# Altium PCB PCB1.PcbDoc (part 2 of 2)
Units mil, origin at the board's own origin, x right, y up, seen from the top; angles counter-clockwise.
Board outline 3937.01 x 3937.01 mil, 4 copper layers (L1, L2, L3, L4), stack 61.811 mil thick; 168 components, 216 nets, 917 pads, 302 vias.
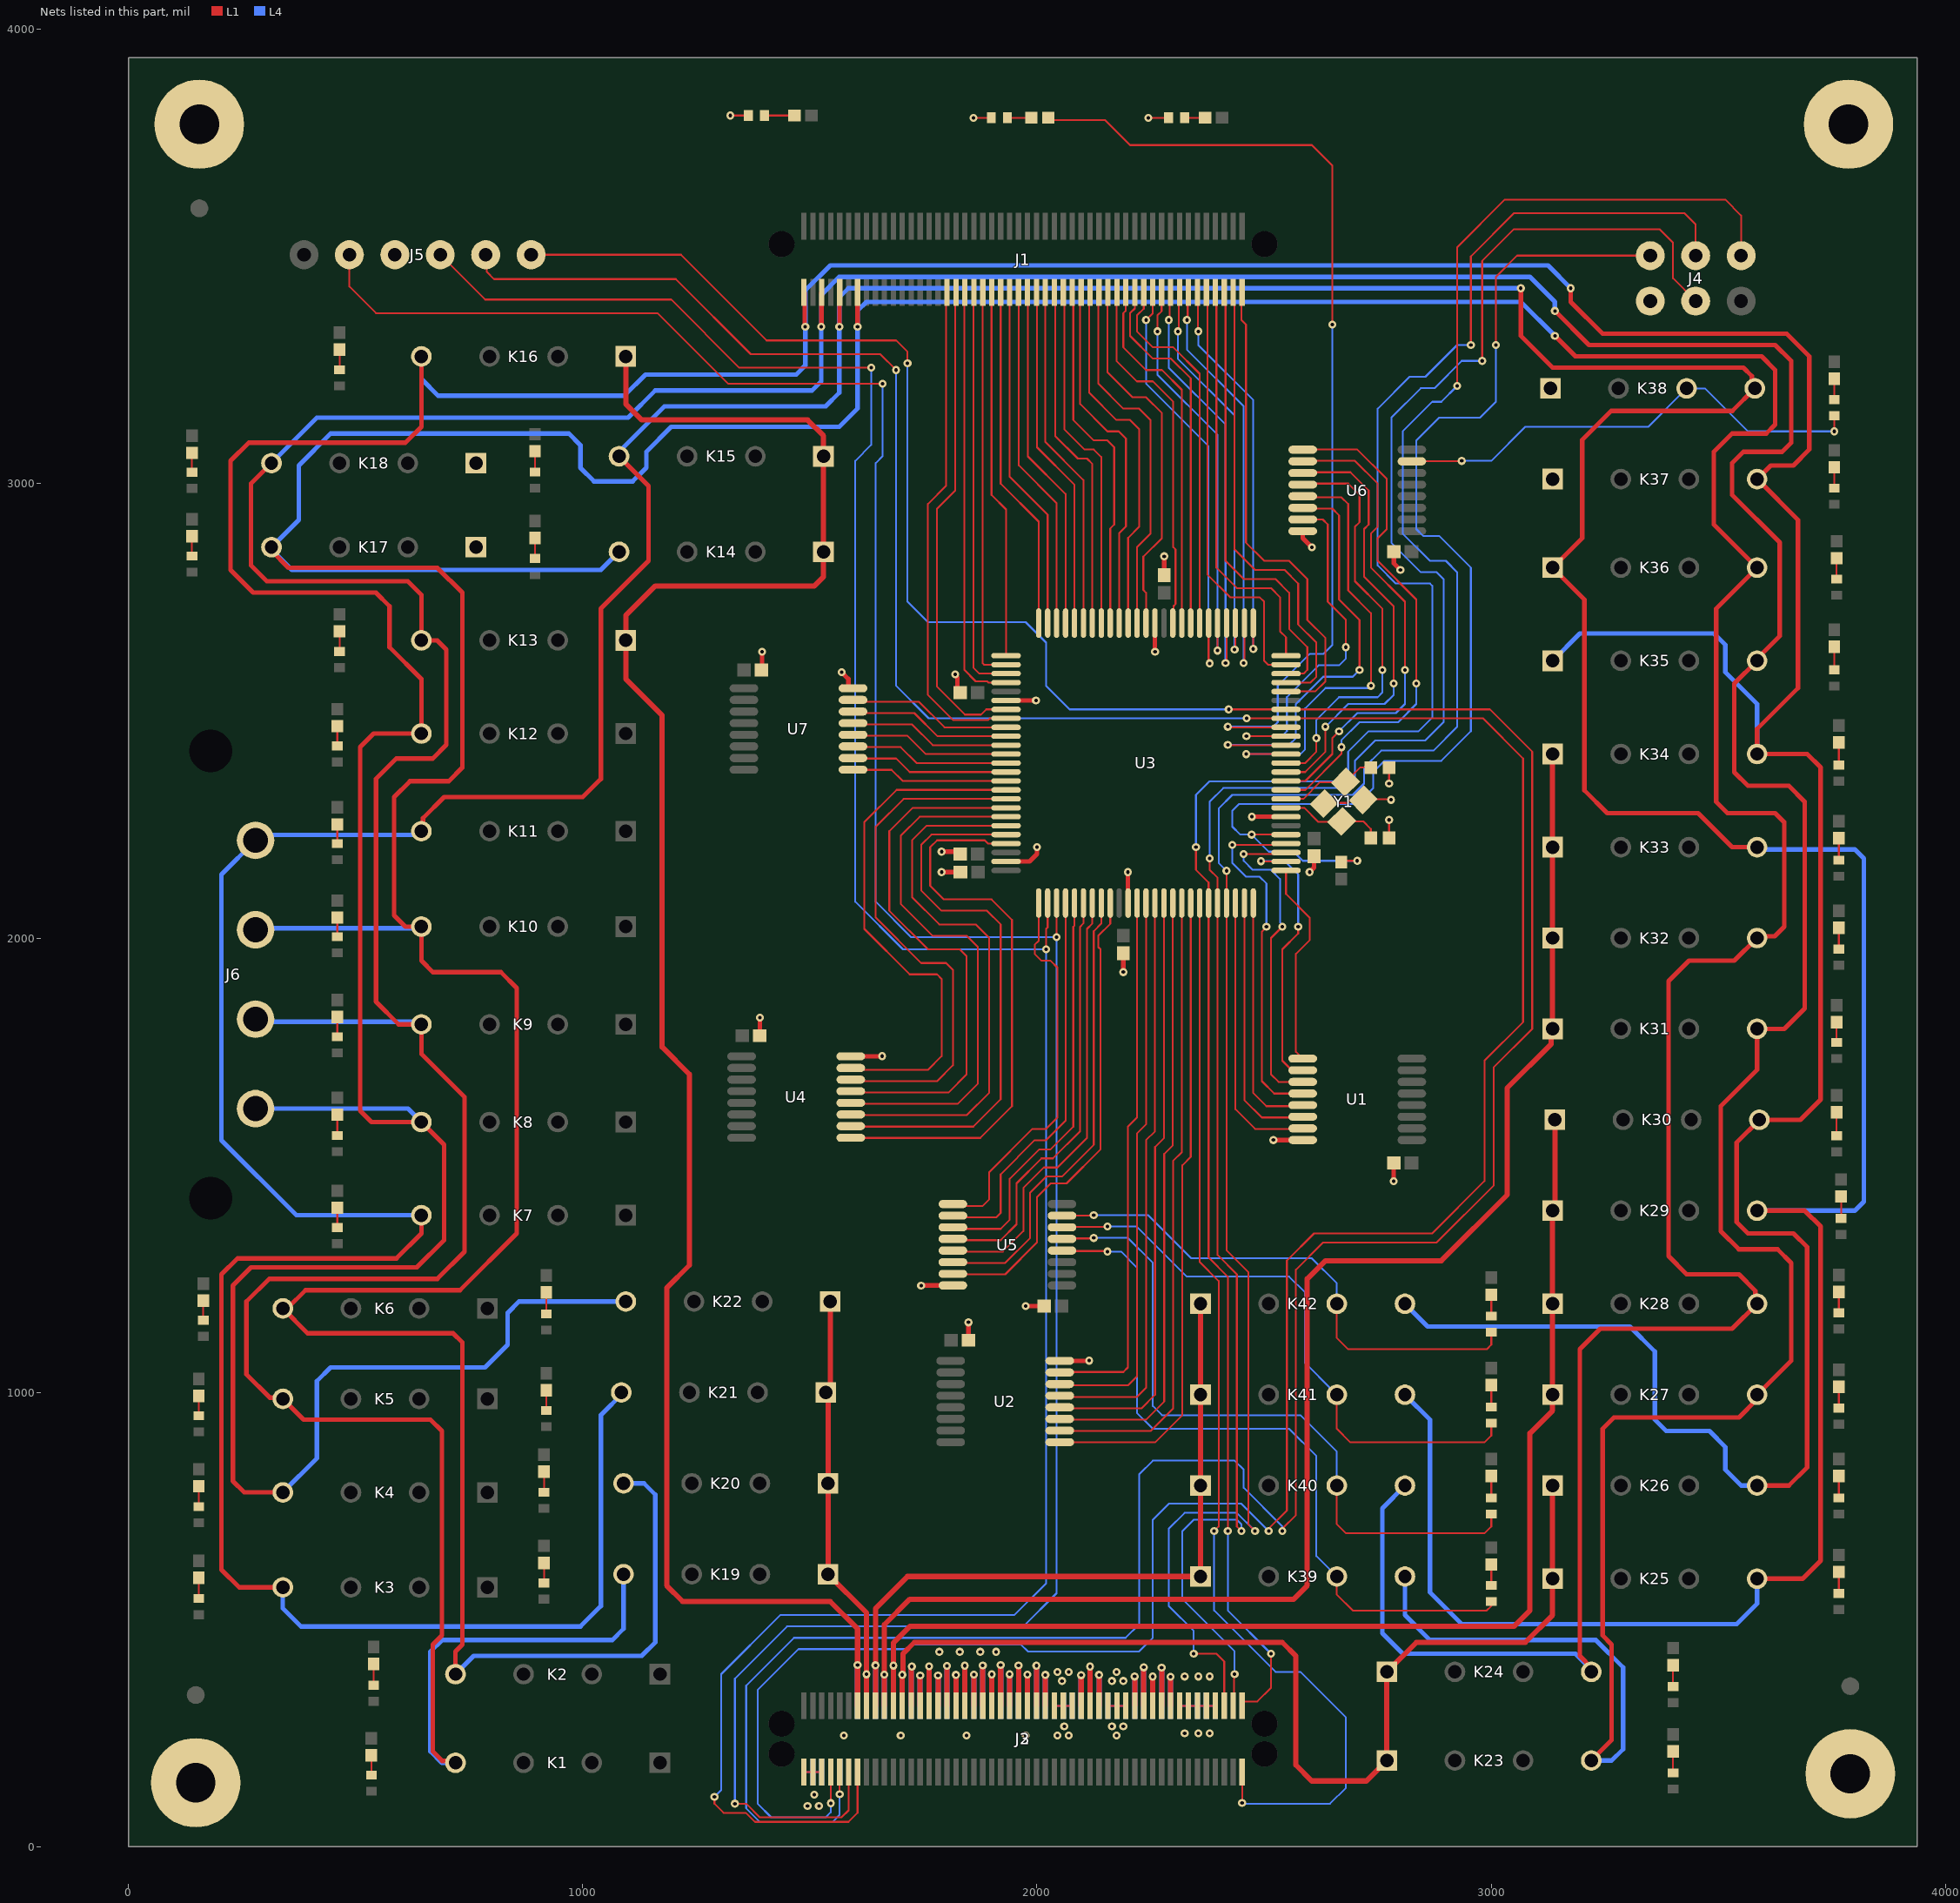
[diagram p4: the nets of this part, all layers, seen from the top]

## Via types
v1: diameter 17.72, hole 7.87, L1 to L4, 302 vias

## Nets (pads, with @x,y where several pads share a name; then routed paths per layer and width w, separated by ;. In a path a pad name is that pad's centre, name@x,y a point inside that pad or via, vN(x,y) a via of type N, cw(c..) or ccw(c..) an arc to the next point about the centre after c; other vN are vias at no path point) (continued)
COIL37: D40.1 K38.3 U6.15 | length 1070.2
  L1 w4: U6.15@2825.08,3048.98 2825.59,3049.49 2934.49,3049.49 v1(2935,3050) ; v1(3755,3115) D40.1@3755,3149.57
  L4 w4: v1(2935,3050) 3000,3050 3075,3125 3345.43,3125 K38.3@3430,3209.57 3470.43,3209.57 3565,3115 v1(3755,3115)
COIL38: D43.1 K39.3 U5.12 | length 1627
  L1 w4: U5.12@2055.08,1312.2 2056.18,1311.1 2153.9,1311.1 v1(2155,1310) ; K39.3@2660,595 2660,555 2695,520 2990,520 3000,530 D43.1@3000,540
  L4 w4: v1(2155,1310) 2185,1310 2220,1275 2220,955 2255,920 2555,920 2615,860 2615,640 K39.3@2660,595
COIL39: D26.1 K40.3 U5.13 | length 1546.9
  L1 w4: U5.13@2055.08,1337.8 2056.18,1338.9 2123.9,1338.9 v1(2125,1340) ; K40.3@2660,795 2660,710 2680,690 2985,690 3000,705 D26.1@3000,732.38
  L4 w4: v1(2125,1340) 2200,1340 2255,1285 2255,970 2275,950 2580,950 2660,870 K40.3@2660,795 2670,795 K40.3@2670,805
COIL40: D32.1 K41.3 U5.14 | length 1323.3
  L1 w4: U5.14@2055.08,1363.39 2055.89,1364.19 2154.19,1364.19 v1(2155,1365) ; K41.3@2660,995 2665,990 2660,985 2660,920 2690,890 2985,890 3000,905 D32.1@3000,932.38 D32.1@3000,935
  L4 w4: v1(2155,1365) 2220,1365 2330,1255 2555,1255 2590,1220 2590,1065 2650,1005 2650,995 K41.3@2660,995
COIL41: D38.1 K42.3 U5.15 | length 1172
  L1 w4: U5.15@2055.08,1388.98 2055.59,1389.49 2124.49,1389.49 v1(2125,1390) ; K42.3@2660,1195 2660,1120 2685,1095 2990,1095 3000,1105 D38.1@3000,1132.38 D38.1@3000,1135
  L4 w4: v1(2125,1390) 2245,1390 2340,1295 2605,1295 2660,1240 K42.3@2660,1195
COM: J2.67 J3.68 | length 135.8
  L1 w11.55: J2.67@2136.57,310.51 v1(2136.57,378.43)
  L4 w11.55: J3.68@2136.57,310.51 v1(2136.57,378.43)
D: J2.13 J3.14 K13.1 K14.1 K15.1 K16.1 | length 4281.2
  L1 w11.55: K16.1@1095,3280 1095,3175 1130,3140 1495,3140 1530,3105 K15.1@1530,3060 K14.1@1530,2850 1530,2795 1510,2775 1160,2775 1095,2710 K13.1@1095,2655 1095,2570 1175,2490 1175,1760 1235,1700 1235,1280 1185,1230 1185,575 1220,540 1545,540 1605.08,479.92 v1(1605.08,399.92) J2.13@1605.08,310.51
  L4 w11.55: J3.14@1605.08,310.51 v1(1605.08,399.92)
DATA: R3.1 U3.42 | length 2206.4
  L1 w4: R3.1@2025,3800 2150,3800 2205,3745 2605,3745 2650,3700 v1(2650,3350) ; v1(2420,2465) 2421.26,2463.74 U3.42@2548.07,2463.74
  L4 w4: v1(2420,2465) 2520,2465 2530,2475 2530,2555 2600,2625 2630,2625 2650,2645 v1(2650,3350) v1@2650,3355
E: J2.15 J3.16 K19.1 K20.1 K21.1 K22.1 | length 995.9
  L1 w11.55: K22.1@1545,1200 1545,1005 1540,1000 K20.1@1540,800 K19.1@1540,600 1624.76,515.24 v1(1624.76,379.76) J2.15@1624.76,310.51
  L4 w11.55: J3.16@1624.76,310.51 v1(1624.76,379.76)
F: J2.17 J3.18 K39.1 K40.1 K41.1 K42.1 | length 1647.6
  L1 w11.55: J2.17@1644.45,310.51 v1(1644.45,399.45) 1644.45,524.45 1715,595 K39.1@2360,595 K40.1@2360,795 K41.1@2360,995 K42.1@2360,1195
  L4 w11.55: J3.18@1644.45,310.51 v1(1644.45,399.45)
G: J2.19 J3.20 K31.1 K32.1 K33.1 K34.1 | length 3425.9
  L1 w11.55: J2.19@1664.13,310.51 v1(1664.13,379.13) 1664.13,489.13 1720,545 2565,545 2595,575 2595,1250 2635,1290 2890,1290 3035,1435 3035,1670 3131.8,1766.8 3131.8,1796.8 K31.1@3135,1800 3135,1990 K33.1@3135,2200 K34.1@3135,2400 ; K34.1@3130,2420 K34.1@3140,2410
  L4 w11.55: J3.20@1664.13,310.51 v1(1664.13,379.13)
GND: C1.1 C2.1 C3.1 C4.1 C5.1 C6.1 C7.1 C8.1 C9.1 C10.1 C11.1 C12.1 C13.1 C14.1 D1.1 D2.1 D3.1 J2.2 J2.4 J2.6 J2.69 J2.71 J2.73 J2.85 J2.87 J2.89 J2.91 J2.93 J3.1 J3.3 J3.5 J3.70 J3.72 J3.74 J3.86 J3.88 J3.90 J3.92 J3.94 J4.6 J5.3 K17.1 K18.1 K37.1 K38.1 MH1.1 MH2.1 MH3.1 MH4.1 U1.8 U2.8 U3.11 U3.32 U3.62 U3.81 U3.99 U4.8 U5.8 U6.8 U7.8 Y1.2 Y1.4 | length 1933.9
  L1 w4: v1(1325,3810) D1.1@1365,3810 ; C11.1@1393.58,2590 C11.1@1395,2591.42 ; J2.2@1486.97,164.84 J2.4@1506.65,164.84 J2.6@1526.34,164.84 ; U7.8@1572.22,2555.9 1570,2555.9 1576.34,2549.57 U7.8@1595.08,2549.57 ; v1@1658.7,1739.57 v1(1659.13,1740) ; v1(1745,1235) v1@1745.43,1235.43 ; C2.1@1817.75,2552.17 C2.1@1825,2544.92 ; v1(1860,3805) D2.1@1899.57,3805 ; v1@2114.57,1069.57 v1(2115,1070) ; J2.69@2156.26,310.51 J2.71@2175.94,310.51 J2.73@2195.63,310.51 ; v1(2200,2145) v1@2200.31,2144.69 ; U3.11@2200.31,2077.87 2200,2077.56 U3.11@2200.63,2076.93 ; v1(2245,3805) D3.1@2289.57,3805 ; v1@2259.68,2630.32 v1(2260,2630) ; J2.85@2313.74,310.51 J2.87@2333.43,310.51 J2.89@2353.11,310.51 J2.91@2372.8,310.51 J2.93@2392.48,310.51 ; U6.8@2584.92,2895.43 2590,2890.35 2586.26,2890.35 U6.8@2585,2889.1 ; Y1.4@2631.85,2295.82 2633.24,2297.22 2683.4,2297.22 2690.36,2304.18 Y1.2@2718.15,2304.18 2719.54,2305.57 2777.78,2305.57 v1(2779.18,2304.18) ; v1(2775,2260) 2775.08,2259.92 C13.1@2775.08,2220 ; v1(2775.08,2340.08) C14.1@2775.08,2375 ; C9.1@2785,1504.29 C9.1@2785.71,1505
  L1 w10: C8.1@1390,1785 v1(1390,1825) ; C11.1@1395,2591.42 v1(1395,2630) ; v1(1570,2585) 1585,2570 1585,2553.13 1588.56,2549.57 U7.8@1595.08,2549.57 ; U4.8@1590.08,1739.57 v1@1658.7,1739.57 ; v1@1745.43,1235.43 U5.8@1814.92,1235.43 ; v1(1790,2145) C1.1@1831.42,2145 ; v1(1790,2190) C5.1@1831.42,2190 ; v1(1820,2580) 1820,2577.91 1825,2572.91 1825,2544.92 1829.92,2540 C2.1@1830.71,2540 ; C10.1@1849.29,1115 v1(1849.29,1154.29) ; U3.99@1931.93,2168.46 1983.46,2168.46 2000,2185 v1(2000,2200) ; U3.81@1931.93,2522.8 v1(1997.8,2522.8) ; v1(1975,1190) C12.1@2015.71,1190 ; U2.8@2050.08,1069.57 v1@2114.57,1069.57 ; v1(2190,1925) C6.1@2190,1966.42 ; U3.11@2200.31,2077.87 v1@2200.31,2144.69 ; v1@2259.68,2630.32 U3.62@2259.68,2693.07 ; C3.1@2280,2798.58 v1(2280,2840) ; v1(2473.11,2266.89) U3.32@2548.07,2266.89 ; v1(2520.43,1555.43) U1.8@2584.92,1555.43 ; U6.8@2585,2889.1 2585,2880 v1(2605,2860) ; v1(2600,2145) 2610,2155 C4.1@2610,2180 ; v1(2785,1465) C9.1@2785,1504.29 ; C7.1@2785.71,2850 2785.71,2824.29 v1(2800,2810)
  L4 w4: J3.1@1486.97,164.84 J3.3@1506.65,164.84 J3.5@1526.34,164.84 ; J3.70@2156.26,310.51 J3.72@2175.94,310.51 J3.74@2195.63,310.51 ; J3.86@2313.74,310.51 J3.88@2333.43,310.51 J3.90@2353.11,310.51 J3.92@2372.8,310.51 J3.94@2392.48,310.51
  other v1: 1495,90 1520,90 1510,115 1575,245 1700,245 1845,245 1975,245 2175,245 2325,250 2355,250 2380,250 2165,265 2190,265 2165,365 2190,365 2325,375 2355,375 2380,375 2175,385 1785,429.14 1830,429.14 1875,429.14 1910,429.14
GPIO1: J1.100 U3.46 | length 1060.1
  L1 w4: J1.100@2450,3420 2450,3360 2460,3350 2460,2870 2500,2830 2555,2830 2595,2790 2595,2700 2635,2660 2635,2565 2612.48,2542.48 U3.46@2548.07,2542.48
GPIO2: J1.98 U3.47 | length 1032
  L1 w4: J1.98@2430,3420 2435,3415 2435,2855 2480,2810 2545,2810 2575,2780 2575,2690 2615,2650 2615,2575 2602.17,2562.17 U3.47@2548.07,2562.17
GPIO3: J1.96 U3.48 | length 995.9
  L1 w4: J1.96@2415,3420 2415,2830 2455,2790 2525,2790 2555,2760 2555,2680 2595,2640 2595,2590 2586.85,2581.85 U3.48@2548.07,2581.85
GPIO4: J1.94 U3.50 | length 906.1
  L1 w4: J1.94@2395,3420 2395,2815 2440,2770 2515,2770 2535,2750 2535,2675 2548.07,2661.93 U3.50@2548.07,2621.22
GPIO5: J1.92 U3.49 | length 946.4
  L1 w4: J1.92@2375,3415 2375,2800 2425,2750 2490,2750 2500,2740 2500,2610 2508.46,2601.54 U3.49@2548.07,2601.54
GPIO6: J1.90 U3.51 | length 892.4
  L1 w4: J1.90@2353.11,3420.75 2354.06,3419.8 2354.06,3335.94 v1(2355,3335) ; v1(2476.22,2636.22) U3.51@2476.22,2693.07
  L4 w4: v1(2355,3335) 2355,3305 2476.22,3183.78 v1(2476.22,2636.22)
GPIO7: J1.88 U3.52 | length 957.7
  L1 w4: v1(2330,3360) 2331.71,3361.71 2331.71,3419.04 J1.88@2333.43,3420.75 ; v1(2455,2605) 2456.54,2606.54 U3.52@2456.54,2693.07
  L4 w4: v1(2330,3360) 2330,3295 2455,3170 v1(2455,2605)
GPIO8: J1.86 U3.53 | length 897.9
  L1 w4: v1(2310,3335) 2311.87,3336.87 2311.87,3418.88 J1.86@2313.74,3420.75 ; v1(2435,2635) 2436.85,2636.85 U3.53@2436.85,2693.07
  L4 w4: v1(2310,3335) 2310,3275 2435,3150 v1(2435,2635)
GPIO9: J1.84 U3.54 | length 958.2
  L1 w4: v1(2290,3360) 2292.03,3362.03 2292.03,3418.72 J1.84@2294.06,3420.75 ; v1(2415,2605) 2417.17,2607.17 U3.54@2417.17,2693.07
  L4 w4: v1(2290,3360) 2290,3255 2415,3130 v1(2415,2605)
GPIO10: J1.82 U3.55 | length 909.6
  L1 w4: v1(2265,3335) 2265,3370 2274.37,3379.37 J1.82@2274.37,3420.75 ; v1(2397.48,2632.52) U3.55@2397.48,2693.07
  L4 w4: v1(2265,3335) 2265,3240 2397.48,3107.52 2397.48,2637.48 2395,2635 v1(2397.48,2632.52)
GPIO11: J1.80 U3.56 | length 970
  L1 w4: v1(2240,3360) 2254.69,3374.69 J1.80@2254.69,3420.75 ; U3.56@2377.8,2693.07 2377.8,2606.61 v1(2380,2604.41)
  L4 w4: v1(2240,3360) 2240,3220 2377.38,3082.62 2377.38,2607.03 v1(2380,2604.41)
GPIO12: J1.78 U3.57 | length 817.5
  L1 w4: J1.78@2235,3420.75 2235,3385 2220,3370 2220,3335 2255,3300 2300,3300 2358.11,3241.89 U3.57@2358.11,2693.07
GPIO13: J1.76 U3.58 | length 810.6
  L1 w4: J1.76@2215.32,3420.75 2215.32,3385.32 2205,3375 2205,3325 2255,3275 2295,3275 2338.43,3231.57 U3.58@2338.43,2693.07
GPIO14: J1.74 U3.59 | length 803.8
  L1 w4: J1.74@2195.63,3420.75 2195.63,3380.63 2190,3375 2190,3300 2240,3250 2275,3250 2318.74,3206.26 U3.59@2318.74,2693.07
GPIO15: J1.72 U3.60 | length 804.5
  L1 w4: J1.72@2175,3420.75 2175,3270 2220,3225 2255,3225 2300,3180 2300,2860 2305,2855 2305,2735 2300.55,2730.55 2300.55,2694.57 U3.60@2299.06,2693.07
GPIO16: J1.70 U3.63 | length 814.3
  L1 w4: J1.70@2155,3420.75 2155,3245 2210,3190 2240,3190 2275,3155 2275,2880 2234.14,2839.14 2234.14,2765.86 2240,2760 U3.63@2240,2693.07
GPIO17: J1.68 U3.64 | length 808.1
  L1 w4: J1.68@2135,3420.75 2135,3220 2190,3165 2225,3165 2250,3140 2250,2890 2220.31,2860.31 U3.64@2220.31,2693.07
GPIO18: J1.66 U3.65 | length 800.9
  L1 w4: J1.66@2115,3420.75 2115,3200 2175,3140 2205,3140 2225,3120 2225,2905 2200.63,2880.63 U3.65@2200.63,2693.07
GPIO19: J1.64 U3.66 | length 790.3
  L1 w4: J1.64@2095,3420.75 2095,3175 2155,3115 2180,3115 2195.84,3099.16 2195.84,2905.84 2180.94,2890.94 U3.66@2180.94,2693.07
GPIO20: J1.62 U3.67 | length 787.2
  L1 w4: J1.62@2077.52,3420.75 2080,3418.27 2080,3140 2125,3095 2155,3095 2170,3080 2170,2910 2161.26,2901.26 U3.67@2161.26,2693.07
GPIO21: J1.60 U3.68 | length 774.1
  L1 w4: J1.60@2057.83,3420.75 2060,3418.58 2060,3120 2105,3075 2125,3075 2141.57,3058.43 U3.68@2141.57,2693.07
GPIO22: J1.58 U3.69 | length 774.1
  L1 w4: J1.58@2038.15,3420.75 2040,3418.9 2040,3105 2090,3055 2110,3055 2121.89,3043.11 U3.69@2121.89,2693.07
GPIO23: J1.56 U3.70 | length 762.4
  L1 w4: J1.56@2018.46,3420.75 2018.46,3091.54 2102.2,3007.8 U3.70@2102.2,2693.07
GPIO24: J1.54 U3.71 | length 761.9
  L1 w4: J1.54@2000,3420.75 2000,3080 2082.52,2997.48 U3.71@2082.52,2693.07
GPIO25: J1.52 U3.72 | length 762
  L1 w4: J1.52@1980,3420.75 1980,3060 2062.83,2977.17 U3.72@2062.83,2693.07
GPIO26: J1.50 U3.73 | length 762.1
  L1 w4: J1.50@1960,3420.75 1960,3040 2043.15,2956.85 U3.73@2043.15,2693.07
GPIO27: J1.48 U3.74 | length 762.2
  L1 w4: J1.48@1940,3420.75 1940,3015 2023.46,2931.54 U3.74@2023.46,2693.07
GPIO28: J1.46 U3.75 | length 762.4
  L1 w4: J1.46@1920.04,3420.75 1920,3000 2003.78,2916.22 U3.75@2003.78,2693.07
GPIO29: J1.44 U3.76 | length 812.8
  L1 w4: J1.44@1900,3420.75 1900,2975 1931.93,2943.07 U3.76@1931.93,2621.22
GPIO30: J1.42 U3.77 | length 869.1
  L1 w4: J1.42@1880,3420.75 1880,2605 1883.46,2601.54 U3.77@1931.93,2601.54
GPIO31: J1.40 U3.78 | length 903.1
  L1 w4: J1.40@1860,3420.75 1860,2595 1873.15,2581.85 U3.78@1931.93,2581.85
GPIO32: J1.38 U3.79 | length 934.2
  L1 w4: J1.38@1840,3420.75 1840,2590 1865,2565 1890,2565 1892.83,2562.17 U3.79@1931.93,2562.17
GPIO33: J1.36 U3.82 | length 1066.3
  L1 w4: J1.36@1820,3420.75 1820,2985 1780,2945 1780,2553.09 1841.38,2491.71 1876.71,2491.71 1888.11,2503.11 U3.82@1931.93,2503.11
GPIO34: J1.34 U3.83 | length 1099.2
  L1 w4: J1.34@1801.93,3420.75 1800,3418.82 1800,2995 1760,2955 1760,2535 1815,2480 1893.03,2480 1896.45,2483.43 U3.83@1931.93,2483.43
H: J2.21 J3.22 K27.1 K28.1 K29.1 K30.1 | length 2760.1
  L1 w11.55: J2.21@1683.82,310.51 v1(1683.82,398.82) 1683.82,448.82 1720,485 3050,485 3085,520 3085,910 3135,960 K27.1@3135,995 K28.1@3135,1195 K29.1@3135,1400 3140,1405 K30.1@3140,1600
  L4 w11.55: J3.22@1683.82,310.51 v1(1683.82,398.82)
I: J2.23 J3.24 K23.1 K24.1 K25.1 K26.1 | length 2440.2
  L1 w11.55: J2.23@1703.5,310.51 v1(1703.5,378.5) ; v1@1704.94,378.5 1704.94,424.94 1730,450 2540,450 2570,420 2570,180 2605,145 2725,145 K23.1@2770,190 K24.1@2770,385 2835,450 3075,450 3135,510 K25.1@3135,590 K26.1@3135,795
  L4 w11.55: J3.24@1703.5,310.51 v1(1703.5,378.5)
I-S_HIGH: J1.10 J6.1 K3.4 K7.4 K11.4 K15.4 K21.4 K25.4 K29.4 K33.4 K36.1 K38.4 K41.4 | length 13679.6
  L1 w4: K11.4@645,2235 K11.4@648.64,2238.64 ; v1(1565,3345) v1@1565.35,3345.35 ; J1.10@1565.35,3420.39 J1.10@1565.71,3420.75
  L1 w10: K3.4@340,570.99 244.01,570.99 205,610 205,1260 240,1295 590,1295 645,1350 K7.4@645,1390 ; K11.4@648.64,2238.64 648.64,2263.64 695,2310 1000,2310 1040,2350 1040,2725 1145,2830 1145,2995 K15.4@1080,3060 ; v1@1565.35,3345.35 J1.10@1565.35,3420.39 ; v1(3065,3430) 3065,3325 3135,3255 3555,3255 3573.6,3236.4 3573.6,3215.97 K38.4@3580,3209.57 3530.43,3160 3263.91,3160 3200,3096.09 3200,2880 K36.1@3135,2815 3205,2745 3205,2325 3255,2275 3455,2275 3530,2200 K33.4@3585,2200 ; K25.4@3585,590 3685,590 3725,630 3725,1365 3690,1400 K29.4@3585,1400
  L4 w4: J6.1@280.04,2215 J6.1@292.14,2227.1 ; K11.4@637.1,2227.1 K11.4@645,2235 ; K15.4@1080,3060 K15.4@1080,3070 ; v1@3056.29,3430 v1(3065,3430) ; K33.4@3585,2200 K33.4@3590,2195
  L4 w10: J6.1@280.04,2215 205,2139.96 205,1555 370,1390 K7.4@645,1390 ; J6.1@292.14,2227.1 K11.4@637.1,2227.1 ; K3.4@340,570.99 340,525 380,485 995,485 1040,530 1040,950 K21.4@1090,1000 ; K15.4@1080,3070 1180,3170 1535,3170 1565,3200 v1(1565,3345) 1565,3410 1585,3430 v1@3056.29,3430 ; K41.4@2810,995 2865,940 2865,560 2935,490 3540,490 3585,535 K25.4@3585,590 ; K29.4@3585,1400 3800,1400 3820,1420 3820,2175 3800,2195 K33.4@3590,2195
J: J2.25 J3.26 | length 173.7
  L1 w11.55: J2.25@1723.19,310.51 1723.19,393.75 1724.57,395.14 v1(1724.57,396.81)
  L4 w11.55: J3.26@1723.19,310.51 1723.19,393.75 1724.57,395.14 v1(1724.57,396.81)
K: J2.27 J3.28 | length 133.2
  L1 w11.55: J2.27@1742.87,310.51 v1(1742.87,377.13)
  L4 w11.55: J3.28@1742.87,310.51 v1(1742.87,377.13)
L: J2.29 J3.30 | length 173.9
  L1 w11.55: J2.29@1762.56,310.51 v1(1762.56,397.44)
  L4 w11.55: J3.30@1762.56,310.51 v1(1762.56,397.44)
M: J2.31 J3.32 | length 133.5
  L1 w11.55: J2.31@1782.24,310.51 v1(1782.24,377.24)
  L4 w11.55: J3.32@1782.24,310.51 v1(1782.24,377.24)
MISO: J2.95 J4.1 U3.22 | length 4891.5
  L1 w4: v1(2345,425) 2395,425 2412.17,407.83 J2.95@2412.17,310.51 ; v1(2417.17,2147.83) U3.22@2417.17,2076.93 2417.17,1312.83 2465,1265 2465,710 v1(2480,695) ; v1(2925,3215) 2925,3520 3030,3625 3515,3625 3549.92,3590.08 J4.1@3549.92,3501.69
  L4 w4: v1(2345,425) 2345,475 2290,530 2290,700 2325,735 2440,735 v1(2480,695) ; v1(2417.17,2147.83) 2400,2165 2400,2285 2430,2315 2695,2315 2720,2340 2720,2375 2757.5,2412.5 2872.5,2412.5 2925,2465 2925,2805 2900,2830 2865,2830 2805,2890 2805,3115 2870,3180 2890,3180 v1(2925,3215)
MOSI: J2.97 J4.4 U3.21 | length 4661.1
  L1 w4: v1(2380,2175) 2380,2150 2397.48,2132.52 U3.21@2397.48,2076.93 2397.48,1302.52 2440,1260 2440,705 v1(2450,695) ; J2.97@2431.85,310.51 2433.43,312.09 2433.43,378.43 v1(2435,380) ; v1(2980,3270) 2980,3490 3050,3560 3370,3560 3400,3530 3400,3451.61 J4.4@3449.92,3401.69
  L4 w4: v1(2380,2175) 2380,2300 2410,2330 2685,2330 2700,2345 2700,2390 2745,2435 2855,2435 2895,2475 2895,2790 2880,2805 2845,2805 2780,2870 2780,3145 2845,3210 2875,3210 2935,3270 v1(2980,3270) ; v1(2435,380) 2435,430 2320,545 2320,695 2345,720 2440,720 2450,710 v1(2450,695)
N: J2.33 J3.34 | length 175.1
  L1 w11.55: J2.33@1801.93,310.51 v1(1801.93,398.07)
  L4 w11.55: J3.34@1801.93,310.51 v1(1801.93,398.07)
NetC13_2: C13.2 U3.33 Y1.1 | length 228.5
  L1 w4: U3.33@2548.07,2286.57 2588.43,2286.57 2619.54,2255.46 2669.43,2255.46 Y1.1@2670.82,2256.85 2672.22,2258.24 2700.01,2258.24 2701.4,2256.85 2718.15,2256.85 2734.92,2240.08 C13.2@2734.92,2220
NetC14_2: C14.2 U3.34 Y1.3 | length 215.3
  L1 w4: U3.34@2548.07,2306.26 2586.26,2306.26 2623.15,2343.15 Y1.3@2679.18,2343.15 2711.03,2375 C14.2@2734.92,2375
NetD1_2: D1.2 R2.2 | length 65.9
  L1 w4: D1.2@1400.43,3810 R2.2@1466.3,3810
NetD2_2: D2.2 R3.2 | length 52.6
  L1 w4: D2.2@1935,3805 R3.2@1987.6,3805
NetD3_2: D3.2 R4.2 | length 45
  L1 w4: D3.2@2325,3805 R4.2@2370,3805
NetD4_2: D4.2 R5.2 | length 43.5
  L1 w4: D4.2@535,157.82 R5.2@535,201.3
NetD5_2: D5.2 R6.2 | length 43.5
  L1 w4: D5.2@155,948.8 R6.2@155,992.28
NetD6_2: D6.2 R7.2 | length 45.9
  L1 w4: D6.2@460,1565.43 R7.2@460,1611.3
NetD7_2: D7.2 R8.2 | length 42.2
  L1 w4: D7.2@460,2207.82 R8.2@460,2250
NetD8_2: D8.2 R9.2 | length 44.6
  L1 w4: D8.2@895,2835.43 R9.2@895,2880
NetD9_2: D9.2 R10.2 | length 42.6
  L1 w4: D9.2@140,3025 R10.2@140,3067.6
NetD10_2: D10.2 R11.2 | length 47.2
  L1 w4: D10.2@540,355.43 R11.2@540,402.6
NetD11_2: D11.2 R12.2 | length 43.5
  L1 w4: D11.2@165,1158.8 R12.2@165,1202.28
NetD12_2: D12.2 R13.2 | length 43.5
  L1 w4: D12.2@460,1782.82 R13.2@460,1826.3
NetD13_2: D13.2 R14.2 | length 43.5
  L1 w4: D13.2@460,2422.82 R14.2@460,2466.3
NetD14_2: D14.2 R15.2 | length 45.9
  L1 w4: D14.2@895,3025.43 R15.2@895,3071.3
NetD15_2: D15.2 R16.2 | length 44.6
  L1 w4: D15.2@915,580.43 R16.2@915,625
NetD16_2: D16.2 R17.2 | length 45.9
  L1 w4: D16.2@155,546.42 R17.2@155,592.28
NetD17_2: D17.2 R18.2 | length 43.5
  L1 w4: D17.2@460,1362.82 R18.2@460,1406.3
NetD18_2: D18.2 R20.2 | length 44.6
  L1 w4: D18.2@465,2630.43 R20.2@465,2675
NetD19_2: D19.2 R21.2 | length 44.6
  L1 w4: D19.2@465,3250.43 R21.2@465,3295
NetD20_2: D20.2 R22.2 | length 45
  L1 w4: D20.2@915,780.43 R22.2@915,825.43
NetD21_2: D21.2 R19.2 | length 42.2
  L1 w4: D21.2@460,2002.82 R19.2@460,2045
NetD22_2: D22.2 R23.2 | length 44.8
  L1 w4: D22.2@155,748.8 R23.2@155,793.58
NetD23_2: D23.2 R24.2 | length 44.6
  L1 w4: D23.2@920,960.43 R24.2@920,1005
NetD24_2: D24.2 R25.2 | length 43.5
  L1 w4: D24.2@140,2840.43 R25.2@140,2883.92
NetD25_2: D25.2 R26.2 | length 47.2
  L1 w4: D25.2@920,1172.82 R26.2@920,1220
NetD26_2: D26.2 R27.2 | length 48.5
  L1 w4: D26.2@3000,767.82 R27.2@3000,816.3
NetD27_2: D27.2 R28.2 | length 48.5
  L1 w4: D27.2@3770,1382.82 R28.2@3770,1431.3
NetD28_2: D28.2 R29.2 | length 48.5
  L1 w4: D28.2@3765,2171.52 R29.2@3765,2220
NetD29_2: D29.2 R30.2 | length 45.9
  L1 w4: D29.2@3760,2790 R30.2@3760,2835.87
NetD30_2: D30.2 R31.2 | length 48.5
  L1 w4: D30.2@3765,767.82 R31.2@3765,816.3
NetD31_2: D31.2 R32.2 | length 47.2
  L1 w4: D31.2@3400,162.82 R32.2@3400,210
NetD32_2: D32.2 R33.2 | length 48.5
  L1 w4: D32.2@3000,967.82 R33.2@3000,1016.3
NetD33_2: D33.2 R34.2 | length 51.3
  L1 w4: D33.2@3760,1565 R34.2@3760,1616.3
NetD34_2: D34.2 R35.2 | length 49.6
  L1 w4: D34.2@3765,2380.43 R35.2@3765,2430
NetD35_2: D35.2 R36.2 | length 45.9
  L1 w4: D35.2@3755,2990 R36.2@3755,3035.87
NetD36_2: D36.2 R37.2 | length 47.2
  L1 w4: D36.2@3765,965.43 R37.2@3765,1012.6
NetD37_2: D37.2 R38.2 | length 47.2
  L1 w4: D37.2@3400,352.82 R38.2@3400,400
NetD38_2: D38.2 R39.2 | length 47.2
  L1 w4: D38.2@3000,1167.82 R39.2@3000,1215
NetD39_2: D39.2 R41.2 | length 50.9
  L1 w4: D39.2@3755,2590 R41.2@3755,2640.87
NetD40_2: D40.2 R42.2 | length 45.9
  L1 w4: D40.2@3755,3185 R42.2@3755,3230.87
NetD41_2: D41.2 R43.2 | length 45.9
  L1 w4: D41.2@3765,1175.43 R43.2@3765,1221.3
NetD42_2: D42.2 R40.2 | length 44.6
  L1 w4: D42.2@3760,1770.43 R40.2@3760,1815
NetD43_2: D43.2 R44.2 | length 45.9
  L1 w4: D43.2@3000,575.43 R44.2@3000,621.3
NetD44_2: D44.2 R45.2 | length 47.2
  L1 w4: D44.2@3765,1975.43 R45.2@3765,2022.6
NetD45_2: D45.2 R46.2 | length 47.2
  L1 w4: D45.2@3765,557.82 R46.2@3765,605
O: J2.35 J3.36 | length 135.7
  L1 w11.55: J2.35@1821.61,310.51 v1(1821.61,378.39)
  L4 w11.55: J3.36@1821.61,310.51 v1(1821.61,378.39)
P: J2.37 J3.38 | length 176.4
  L1 w11.55: J2.37@1841.3,310.51 v1(1841.3,398.7)
  L4 w11.55: J3.38@1841.3,310.51 v1(1841.3,398.7)
Q: J2.39 J3.40 | length 137
  L1 w11.55: J2.39@1860.98,310.51 v1(1860.98,379.02)
  L4 w11.55: J3.40@1860.98,310.51 v1(1860.98,379.02)
R: J2.41 J3.42 | length 177.6
  L1 w11.55: J2.41@1880.67,310.51 v1(1880.67,399.33)
  L4 w11.55: J3.42@1880.67,310.51 v1(1880.67,399.33)
RELAY0: U2.1 U3.18 | length 1429.5
  L1 w4: U2.1@2050.08,890.43 2050.51,890 2260,890 2320,950 2320,1500 2338.43,1518.43 U3.18@2338.43,2076.93
RELAY1: U2.2 U3.17 | length 1390.3
  L1 w4: U2.2@2050.08,915 2250,915 2300,965 2300,1510 2318.74,1528.74 U3.17@2318.74,2076.93
RELAY2: U2.3 U3.16 | length 1351.3
  L1 w4: U2.3@2050.08,940 2240,940 2280,980 2280,1525 2299.06,1544.06 U3.16@2299.06,2076.93
RELAY3: U2.4 U3.15 | length 1312.3
  L1 w4: U2.4@2050.08,965 2230,965 2260,995 2260,1540 2279.37,1559.37 U3.15@2279.37,2076.93
RELAY4: U2.5 U3.14 | length 1273.3
  L1 w4: U2.5@2050.08,990 2220,990 2240,1010 2240,1555 2259.68,1574.68 U3.14@2259.68,2076.93
RELAY5: U2.6 U3.13 | length 1229.2
  L1 w4: U2.6@2050.08,1018.39 2052.7,1015.76 2200.76,1015.76 2220,1035 2220,1570 2240,1590 U3.13@2240,2076.93
RELAY6: U2.7 U3.12 | length 1184.4
  L1 w4: U2.7@2050.08,1045 2190,1045 2200,1055 2200,1585 2220.31,1605.31 U3.12@2220.31,2076.93
RELAY7: U3.1 U5.1 | length 848.9
  L1 w4: U5.1@1820,1410 1880,1410 1895,1425 1895,1485 1990,1580 2020,1580 2045,1605 2045,1935 2030,1950 2010,1950 1995,1965 1995,1985 2003.78,1993.78 U3.1@2003.78,2076.93
RELAY8: U3.4 U5.2 | length 864.9
  L1 w4: U5.2@1815,1385 1910,1385 1920,1395 1920,1480 1995,1555 2020,1555 2062.83,1597.83 U3.4@2062.83,2076.93
RELAY9: U3.5 U5.3 | length 898.9
  L1 w4: U5.3@1820,1360 1920,1360 1940,1380 1940,1470 2005,1535 2030,1535 2080,1585 2080,2025 2082.52,2027.52 U3.5@2082.52,2076.93
RELAY10: U3.6 U5.4 | length 937
  L1 w4: U5.4@1815,1335 1920,1335 1955,1370 1955,1460 2010,1515 2035,1515 2095,1575 2095,2025 2102.2,2032.2 U3.6@2102.2,2076.93
RELAY11: U3.7 U5.5 | length 971.1
  L1 w4: U5.5@1820,1310 1925,1310 1970,1355 1970,1450 2015,1495 2045,1495 2110,1560 2110,2020 2121.89,2031.89 U3.7@2121.89,2076.93
RELAY12: U3.8 U5.6 | length 1015.1
  L1 w4: U5.6@1815,1285 1930,1285 1985,1340 1985,1440 2020,1475 2055,1475 2125,1545 2125,2015 2141.57,2031.57 U3.8@2141.57,2076.93
RELAY13: U3.9 U5.7 | length 1047.4
  L1 w4: U5.7@1820,1260 1930,1260 2000,1330 2000,1430 2030,1460 2065,1460 2140,1535 2140,1975 2135,1980 2135,2005 2161.26,2031.26 U3.9@2161.26,2076.93
RELAY14: U3.91 U4.7 | length 1174.2
  L1 w4: U4.7@1590.08,1710 1760,1710 1790,1740 1790,1910 1780,1920 1720,1920 1620,2020 1620,2255 1690.94,2325.94 U3.91@1931.93,2325.94
RELAY15: U3.92 U4.6 | length 1179.4
  L1 w4: U4.6@1590.08,1685 1780,1685 1815,1720 1815,1930 1800,1945 1745,1945 1645,2045 1645,2245 1706.26,2306.26 U3.92@1931.93,2306.26
RELAY16: U3.93 U4.5 | length 1196.2
  L1 w4: U4.5@1590.08,1660 1805,1660 1845,1700 1845,1960 1830,1975 1760,1975 1675,2060 1675,2235 1726.57,2286.57 U3.93@1931.93,2286.57
RELAY17: U3.94 U4.4 | length 1207.2
  L1 w4: U4.4@1590.08,1635 1825,1635 1870,1680 1870,1980 1845,2005 1770,2005 1700,2075 1700,2225 1741.89,2266.89 U3.94@1931.93,2266.89
RELAY18: U3.95 U4.3 | length 1218.2
  L1 w4: U4.3@1590.08,1610 1845,1610 1895,1660 1895,2000 1865,2030 1785,2030 1725,2090 1725,2215 1757.2,2247.2 U3.95@1931.93,2247.2
RELAY19: U3.96 U4.2 | length 1242.1
  L1 w4: U4.2@1590.08,1585 1860,1585 1920,1645 1920,2030 1890,2060 1790,2060 1745,2105 1745,2205 1767.52,2227.52 U3.96@1931.93,2227.52
RELAY20: U3.97 U4.1 | length 1266.1
  L1 w4: U4.1@1590.08,1560 1875,1560 1945,1630 1945,2040 1900,2085 1795,2085 1765,2115 1765,2200 1780,2215 1885,2215 1892.17,2207.83 U3.97@1931.93,2207.83
RELAY21: U1.1 U3.26 | length 454.3
  L1 w4: U3.26@2548.07,2148.78 2548.07,2096.93 2600,2045 2600,1995 2570,1965 2570,1749.49 U1.1@2584.92,1734.57
RELAY22: U1.2 U3.27 | length 627
  L1 w4: v1(2493.29,2169.14) 2493.62,2168.8 2547.73,2168.8 U3.27@2548.07,2168.46 ; v1(2575,2025) 2575,2010 2540,1975 2540,1730 2561.02,1708.98 U1.2@2584.92,1708.98
  L4 w4: v1(2493.29,2169.14) 2545.86,2169.14 2575,2140 v1(2575,2025)
RELAY23: U1.3 U3.28 | length 725.2
  L1 w4: v1(2455,2185) 2544.92,2185 U3.28@2548.07,2188.15 ; v1(2540,2025) 2515,2000 2515,1700 2531.61,1683.39 U1.3@2584.92,1683.39
  L4 w4: v1(2455,2185) 2455,2170 2475,2150 2515,2150 2535,2130 2535,2033.71 2540,2028.71 v1(2540,2025)
RELAY24: U1.4 U3.29 | length 793.2
  L1 w4: v1(2430,2205) 2545.24,2205 U3.29@2548.07,2207.83 ; v1(2505,2025) 2505,2023.99 2495,2013.99 2495,1685 2522.2,1657.8 U1.4@2584.92,1657.8
  L4 w4: v1(2430,2205) 2430,2165 2460,2135 2490,2135 2505,2120 v1(2505,2025)
RELAY25: U1.5 U3.25 | length 548.9
  L1 w4: U3.25@2476.22,2076.93 2476.22,1658.78 2505,1630 U1.5@2595,1630
RELAY26: U1.6 U3.24 | length 577.8
  L1 w4: U3.24@2456.54,2076.93 2456.54,1643.46 2495,1605 U1.6@2584.92,1605
RELAY27: U1.7 U3.23 | length 619.7
  L1 w4: U3.23@2436.85,2076.93 2436.85,1623.15 2480,1580 U1.7@2584.92,1580
RELAY28: U3.84 U7.7 | length 360.2
  L1 w4: U7.7@1595.08,2520 1740,2520 1796.26,2463.74 U3.84@1931.93,2463.74
RELAY29: U3.85 U7.6 | length 358
  L1 w4: U7.6@1595.08,2495 1730,2495 1780.94,2444.06 U3.85@1931.93,2444.06
RELAY30: U3.86 U7.5 | length 355.8
  L1 w4: U7.5@1595.08,2470 1725,2470 1770.63,2424.37 U3.86@1931.93,2424.37
RELAY31: U3.87 U7.4 | length 353.5
  L1 w4: U7.4@1595.08,2445 1715,2445 1755.32,2404.68 U3.87@1931.93,2404.68
RELAY32: U3.88 U7.3 | length 351.3
  L1 w4: U7.3@1595.08,2420 1700,2420 1735,2385 U3.88@1931.93,2385
RELAY33: U3.89 U7.2 | length 349.1
  L1 w4: U7.2@1595.08,2395 1690,2395 1719.69,2365.31 U3.89@1931.93,2365.31
RELAY34: U3.90 U7.1 | length 346.9
  L1 w4: U7.1@1595.08,2370 1680,2370 1704.37,2345.63 U3.90@1931.93,2345.63
RELAY35: U3.35 U6.1 | length 1133.3
  L1 w4: U3.35@2548.07,2325.94 2590.94,2325.94 2670,2405 v1(2670,2420) ; U6.1@2584.92,3075 2705,3075 2770,3010 2770,2900 2750,2880 2750,2830 2835,2745 v1(2835,2560)
  L4 w4: v1(2670,2420) 2670,2435 2710,2475 2795,2475 2835,2515 v1(2835,2560)
RELAY36: U3.36 U6.2 | length 1060.7
  L1 w4: U3.36@2548.07,2345.63 2590.63,2345.63 2650,2405 2650,2440 v1(2665,2455) ; U6.2@2584.92,3050 2700,3050 2750,3000 2750,2905 2735,2890 2735,2815 2810,2740 v1(2810,2590)
  L4 w4: v1(2665,2455) 2705,2495 2790,2495 2810,2515 v1(2810,2590)
RELAY37: U3.37 U6.3 | length 982.1
  L1 w4: U3.37@2548.07,2365.31 2590.31,2365.31 2635,2410 v1(2635,2465) ; U6.3@2584.92,3025 2690,3025 2730,2985 2730,2910 2720,2900 2720,2795 2785,2730 v1(2785,2560)
  L4 w4: v1(2635,2465) 2685,2515 2765,2515 2785,2535 v1(2785,2560)
RELAY38: U3.38 U6.4 | length 916.6
  L1 w4: U3.38@2548.07,2385 2590,2385 2615,2410 v1(2615,2440) ; U6.4@2584.92,3000 2685,3000 2710,2975 2710,2915 2700,2905 2700,2785 2760,2725 v1(2760,2590)
  L4 w4: v1(2615,2440) 2615,2480 2665,2530 2750,2530 2760,2540 v1(2760,2590)
RELAY39: U3.39 U6.5 | length 1004.4
  L1 w4: v1(2460.32,2404.68) U3.39@2548.07,2404.68 ; U6.5@2584.92,2970 2670,2970 2685,2955 2685,2765 2735,2715 v1(2735,2555)
  L4 w4: v1(2460.32,2404.68) 2579.68,2404.68 2590,2415 2590,2505 2635,2550 2730,2550 v1(2735,2555)
RELAY40: U3.40 U6.6 | length 976.2
  L1 w4: v1(2420,2425) 2420.63,2424.37 U3.40@2548.07,2424.37 ; U6.6@2584.92,2946.61 2586.54,2945 2650,2945 2665,2930 2665,2745 2710,2700 v1(2710,2590)
  L4 w4: v1(2420,2425) 2555,2425 2570,2440 2570,2515 2630,2575 2695,2575 v1(2710,2590)
RELAY41: U3.41 U6.7 | length 792.1
  L1 w4: v1(2460.94,2444.06) U3.41@2548.07,2444.06 ; U6.7@2584.92,2921.02 2628.98,2921.02 2640,2910 2640,2740 2680,2700 v1(2680,2640)
  L4 w4: v1(2460.94,2444.06) 2539.06,2444.06 2550,2455 2550,2530 2620,2600 2665,2600 2680,2615 v1(2680,2640)
RST: J4.5 R1.1 U3.30 | length 2627.5
  L1 w4: v1(2472.48,2227.52) U3.30@2548.07,2227.52 ; R1.1@2670,2167.4 2672.6,2170 v1(2705,2170) ; v1(3010,3305) 3010,3455 3056.69,3501.69 J4.5@3349.92,3501.69
  L4 w4: v1(2705,2170) 2585,2170 2565,2190 2510,2190 v1(2472.48,2227.52) 2470,2230 2467.52,2227.52 2447.48,2227.52 2430,2245 2430,2280 2445,2295 2705,2295 2740,2330 2740,2365 2765,2390 2890,2390 2955,2455 2955,2815 2885,2885 2850,2885 2835,2900 2835,3095 2885,3145 2975,3145 3010,3180 v1(3010,3305)
S: J2.43 J3.44 | length 138.3
  L1 w11.55: J2.43@1900.35,310.51 v1(1900.35,379.65)
  L4 w11.55: J3.44@1900.35,310.51 v1(1900.35,379.65)
S_LOW: J1.2 J6.4 K4.4 K8.4 K12.4 K16.4 K22.4 K26.4 K30.4 K34.4 K35.1 K37.4 K42.4 | length 13774.9
  L1 w4: J6.4@280.04,1624.45 J6.4@285,1619.49 ; J1.2@1486.97,3420.75 J1.2@1488.48,3419.23 ; v1@1488.48,3346.52 v1(1490,3345) ; K37.4@3585,3010 K37.4@3590,3005
  L1 w10: K4.4@340,780 255,780 230,805 230,1235 270,1275 635,1275 695,1335 695,1545 K8.4@645,1595 535,1595 510,1620 510,2420 540,2450 K12.4@645,2450 645,2570 575,2640 575,2730 545,2760 275,2760 225,2810 225,3050 265,3090 610,3090 645,3125 K16.4@645,3280 ; v1@1488.48,3346.52 J1.2@1488.48,3419.23 ; v1(3175,3430) 3175,3400 3245,3330 3650,3330 3700,3280 3700,3075 3665,3040 3615,3040 K37.4@3585,3010 ; K26.4@3585,795 3655,795 3695,835 3695,1320 3665,1350 3565,1350 3540,1375 3540,1550 K30.4@3590,1600 3680,1600 3725,1645 3725,2375 3695,2405 K34.4@3585,2405 3585,2460 3675,2550 3675,2920 K37.4@3590,3005
  L4 w10: J6.4@280.04,1624.45 615.55,1624.45 K8.4@645,1595 ; K4.4@340,780 415,855 415,1025 445,1055 785,1055 835,1105 835,1175 860,1200 K22.4@1095,1200 ; K16.4@645,3280 645,3230 681.69,3193.31 1091.69,3193.31 1138.37,3240 1470,3240 1490,3260 v1(1490,3345) 1490,3425 1545,3480 3125,3480 v1(3175,3430) ; K42.4@2810,1195 2860,1145 3305,1145 3360,1090 3360,940 3385,915 3480,915 3515,880 3515,830 3550,795 K26.4@3585,795 ; K35.1@3135,2610 3195,2670 3490,2670 3515,2645 3515,2585 3585,2515 K34.4@3585,2405
SCK: J2.99 J4.3 U3.20 | length 4583.7
  L1 w4: v1(2350,2200) 2350,2150 2377.8,2122.2 U3.20@2377.8,2076.93 2377.8,1297.2 2420,1255 v1(2420,695) ; J2.99@2451.54,310.51 2451.54,316.09 2455.44,320 2485,320 2515,350 v1(2515,425) ; v1(2955,3305) 2955,3500 3050,3595 3425,3595 3449.92,3570.08 J4.3@3449.92,3501.69
  L4 w4: v1(2350,2200) 2350,2315 2380,2345 2675,2345 2685,2355 2685,2410 2730,2455 2840,2455 2870,2485 2870,2775 2865,2780 2790,2780 2750,2820 2750,3165 2820,3235 2855,3235 2925,3305 v1(2955,3305) ; v1(2420,695) 2420,520 v1(2515,425)
SCL: J2.8 J3.7 J5.5 U3.43 | length 7324.7
  L1 w4: J5.5@786.57,3503.66 789.23,3501.01 789.23,3465.77 805,3450 1205,3450 1370,3285 1655,3285 v1(1690,3250) ; v1(1546.02,96.02) J2.8@1546.02,164.84 ; v1(2461.57,2483.43) U3.43@2548.07,2483.43 2981.57,2483.43 3070,2395 3070,1815 2985,1730 2985,1465 2870,1350 2610,1350 2550,1290 2550,740 2510,700 v1(2510,695)
  L4 w4: J3.7@1546.02,164.84 v1(1546.02,96.02) 1546.02,76.02 1535,65 1415,65 1385,95 1385,345 1475,435 1715,435 1725,445 1965,445 1980,430 2225,430 2255,460 2255,720 2290,755 2450,755 v1(2510,695) ; v1(1690,3250) 1690,2555 1761.57,2483.43 v1(2461.57,2483.43)
SDA: J2.10 J3.9 J5.6 U3.44 | length 7433.9
  L1 w4: J5.6@886.57,3503.66 1216.34,3503.66 1405,3315 1690,3315 1715,3290 v1(1715,3265) ; v1(1565.71,115.71) J2.10@1565.71,164.84 ; v1(2421.89,2503.11) U3.44@2548.07,2503.11 2996.89,2503.11 3090,2410 3090,1800 3005,1715 3005,1455 2880,1330 2630,1330 2570,1270 2570,730 2540,700 v1(2540,695)
  L4 w4: J3.9@1565.71,164.84 v1(1565.71,115.71) 1565.71,70.71 1549.25,54.25 1390.75,54.25 1360,85 1360,355 1465,460 2195,460 2225,490 2225,820 2255,850 2435,850 2455,830 2455,790 2540,705 v1(2540,695) ; v1(1715,3265) 1715,2740 1760,2695 1975,2695 2020,2650 2020,2555 2071.89,2503.11 v1(2421.89,2503.11)
SS: J2.100 U3.19 | length 2432
  L1 w4: U3.19@2358.11,2076.93 2358.11,1286.89 2400,1245 2400,705 v1(2390,695) ; v1(2451.54,96.54) J2.100@2451.54,164.84
  L4 w4: v1(2390,695) 2390,520 2525,385 2580,385 2680,285 2680,130 2645,95 v1@2451.54,95
T: J2.45 J3.46 | length 178.9
  L1 w11.55: J2.45@1920.04,310.51 v1(1920.04,399.96)
  L4 w11.55: J3.46@1920.04,310.51 v1(1920.04,399.96)
U: J2.47 J3.48 | length 138.4
  L1 w11.55: J2.47@1939.72,310.51 v1(1939.72,379.72)
  L4 w11.55: J3.48@1939.72,310.51 v1(1939.72,379.72)
V-I_LOW: J1.6 J6.3 K1.4 K5.4 K9.4 K13.4 K18.4 K19.4 K23.4 K27.4 K31.4 K35.4 K39.4 | length 14172.7
  L1 w4: J6.3@280.04,1821.3 J6.3@295,1806.34 ; K5.4@337.35,988.64 K5.4@340,985.99 ; K1.4@716.36,188.64 K1.4@720,185 ; v1(1525,3345) v1@1525.67,3345.67 ; J1.6@1525.67,3420.08 J1.6@1526.34,3420.75 ; K27.4@3585,985 K27.4@3585,995 ; K35.4@3585,2610 K35.4@3585,2615
  L1 w10: K18.4@315,3045 270,3000 270,2820 305,2785 615,2785 645,2755 K13.4@645,2655 680,2655 700,2635 700,2425 670,2395 590,2395 545,2350 545,1860 595,1810 K9.4@645,1810 645,1745 740,1650 740,1310 680,1250 310,1250 260,1200 260,1040 311.36,988.64 K5.4@337.35,988.64 ; K5.4@340,985.99 385.99,940 665,940 690,915 690,465 670,445 670,210 690.88,189.12 715.88,189.12 K1.4@716.36,188.64 ; v1@1525.67,3345.67 J1.6@1525.67,3420.08 ; v1(3140,3380) 3215,3305 3625,3305 3660,3270 3660,3090 3640,3070 3555,3070 3530,3045 3530,2975 3635,2870 3635,2665 K35.4@3585,2615 ; K23.4@3220,190 3265,235 3265,445 3245,465 3245,920 3270,945 3545,945 K27.4@3585,985 ; K27.4@3585,995 3660,1070 3660,1285 3630,1315 3545,1315 3505,1355 3505,1630 3585,1710 K31.4@3585,1800 3645,1800 3690,1845 3690,2300 3655,2335 3565,2335 3535,2365 3535,2560 K35.4@3585,2610
  L4 w4: J6.3@280.04,1821.3 J6.3@285.69,1815.65 ; K9.4@639.35,1815.65 K9.4@645,1810
  L4 w10: J6.3@285.69,1815.65 K9.4@639.35,1815.65 ; K18.4@315,3045 415,3145 1100,3145 1160,3205 1505,3205 1525,3225 v1(1525,3345) 1525,3415 1565,3455 3085,3455 3140,3400 v1(3140,3380) ; K1.4@720,185 690,185 665,210 665,430 690,455 1065,455 1090,480 K19.4@1090,600 ; K39.4@2810,595 2810,510 2865,455 3230,455 3290,395 3290,215 3265,190 K23.4@3220,190
V_HIGH: J1.14 J6.2 K2.4 K6.4 K10.4 K14.4 K17.4 K20.4 K24.4 K28.4 K32.4 K36.4 K40.4 | length 14689.1
  L1 w4: K6.4@340,1185 K6.4@350,1185 ; v1(1605,3345) v1(1605,3345) ; J1.14@1605.04,3420.71 J1.14@1605.08,3420.75 ; K24.4@3220,385 K24.4@3220,395 ; K28.4@3581.36,1198.64 K28.4@3585,1195 ; K32.4@3585,2000 K32.4@3588.64,2003.64
  L1 w10: K17.4@315,2860 315,2852.5 352.5,2815 680,2815 735,2760 735,2375 705,2345 620,2345 585,2310 585,2050 610,2025 K10.4@645,2025 645,1950 670,1925 820,1925 855,1890 855,1350 730,1225 390,1225 K6.4@350,1185 ; K6.4@340,1185 395,1130 715,1130 735,1110 735,445 720,430 K2.4@720,380 ; v1(1605,3345) J1.14@1605.04,3420.71 ; v1(3140,3325) 3185,3280 3595,3280 3625,3250 3625,3130 3605,3110 3530,3110 3490,3070 3490,2910 K36.4@3585,2815 3495,2725 3495,2300 3520,2275 3625,2275 3645,2255 3645,2025 3623.64,2003.64 K32.4@3588.64,2003.64 ; K24.4@3220,395 3195,420 3195,1095 3240,1140 3530,1140 K28.4@3585,1195 ; K28.4@3581.36,1198.64 3581.36,1223.64 3545,1260 3430,1260 3390,1300 3390,1905 3435,1950 3535,1950 K32.4@3585,2000
  L4 w4: J6.2@280.04,2018.15 J6.2@283.46,2021.57 ; K17.4@315,2855 K17.4@315,2860 ; K10.4@641.57,2021.57 K10.4@645,2025 ; K24.4@3220,385 K24.4@3220,390
  L4 w10: J6.2@283.46,2021.57 K10.4@641.57,2021.57 ; K17.4@315,2855 360,2810 1040,2810 K14.4@1080,2850 ; K17.4@315,2860 375,2920 375,3040 445,3110 970,3110 995,3085 995,3035 1025,3005 1110,3005 1140,3035 1140,3070 1195,3125 1565,3125 1605,3165 v1(1605,3345) 1605,3380 1625,3400 3065,3400 v1(3140,3325) ; K2.4@720,380 760,420 1130,420 1160,450 1160,775 1135,800 K20.4@1090,800 ; K40.4@2810,795 2760,745 2760,470 2805,425 3185,425 K24.4@3220,390
VIDB_RX: J2.14 J5.4 U3.2 | length 5721.6
  L1 w4: J5.4@686.57,3503.66 785.24,3405 1195,3405 1345,3255 v1(1635,3255) ; v1(1290,110) 1290,95 1310,75 1359.25,75 1379.25,55 1585,55 1605.08,75.08 J2.14@1605.08,164.84 ; v1(2020,1975) 2020,2020 2023.46,2023.46 U3.2@2023.46,2076.93
  L4 w4: v1(1290,110) 1305,125 1305,380 1435,510 1950,510 2020,580 v1(2020,1975) 1705,1975 1600,2080 1600,3050 1635,3085 v1(1635,3255)
VIDB_TX: J2.12 J5.2 U3.3 | length 5842.3
  L1 w4: J5.2@486.57,3503.66 486.57,3433.43 545,3375 1165,3375 1320,3220 v1(1660,3220) ; v1(1335,95) 1360,95 1390,65 1570,65 1585.39,80.39 J2.12@1585.39,164.84 ; v1(2043.15,2001.85) U3.3@2043.15,2076.93
  L4 w4: v1(1335,95) 1335,370 1450,485 1970,485 2043.15,558.15 v1(2043.15,2001.85) 1723.15,2001.85 1645,2080 1645,3045 1660,3060 v1(1660,3220)
W: J2.49 J3.50 | length 177.8
  L1 w11.55: J2.49@1959.41,310.51 v1(1959.41,399.41)
  L4 w11.55: J3.50@1959.41,310.51 v1(1959.41,399.41)
X: J2.51 J3.52 | length 137.2
  L1 w11.55: J2.51@1979.09,310.51 v1(1979.09,379.09)
  L4 w11.55: J3.52@1979.09,310.51 v1(1979.09,379.09)
X1: J2.57 J2.59 J2.61 J3.58 J3.60 J3.62 | length 78.7
  L1 w4: J2.57@2038.15,310.51 J2.59@2057.83,310.51 J2.61@2077.52,310.51
  L4 w4: J3.58@2038.15,310.51 J3.60@2057.83,310.51 J3.62@2077.52,310.51
  other v1: 2045,245 2070,245 2060,265 2055,365 2045,385 2070,385
X2: J2.63 J3.64 | length 134.6
  L1 w11.55: J2.63@2097.2,310.51 v1(2097.2,377.8)
  L4 w11.55: J3.64@2097.2,310.51 v1(2097.2,377.8)
X3: J2.65 J3.66 | length 172.8
  L1 w11.55: J2.65@2116.89,310.51 v1(2116.89,396.89)
  L4 w11.55: J3.66@2116.89,310.51 v1(2116.89,396.89)
X4: J2.75 J3.76 | length 129.2
  L1 w4: J2.75@2215,310.83 J2.75@2215.32,310.51
  L1 w11.55: J2.75@2215,310.83 v1(2215,375)
  L4 w4: v1(2215,375) v1@2215.16,374.84 ; J3.76@2215.16,310.67 J3.76@2215.32,310.51
  L4 w11.55: J3.76@2215.16,310.67 v1@2215.16,374.84
X5: J2.77 J3.78 | length 169
  L1 w11.55: J2.77@2235,310.51 v1(2235,395)
  L4 w11.55: J3.78@2235,310.51 v1(2235,395)
X6: J2.79 J3.80 | length 128.3
  L1 w11.55: J2.79@2254.69,310.51 v1(2254.69,374.69)
  L4 w11.55: J3.80@2254.69,310.51 v1(2254.69,374.69)
X7: J2.81 J3.82 | length 167.7
  L1 w11.55: J2.81@2274.37,310.51 v1(2274.37,394.37)
  L4 w11.55: J3.82@2274.37,310.51 v1(2274.37,394.37)
X8: J2.83 J3.84 | length 127.1
  L1 w11.55: J2.83@2294.06,310.51 v1(2294.06,374.06)
  L4 w11.55: J3.84@2294.06,310.51 v1(2294.06,374.06)
Y: J2.53 J3.54 | length 176.5
  L1 w11.55: J2.53@1998.78,310.51 v1(1998.78,398.78)
  L4 w11.55: J3.54@1998.78,310.51 v1(1998.78,398.78)
Z: J2.55 J3.56 | length 135.9
  L1 w11.55: J2.55@2018.46,310.51 v1(2018.46,378.46)
  L4 w11.55: J3.56@2018.46,310.51 v1(2018.46,378.46)
pads on no net: FD1.0 FD2.0 FD3.0 J1. J1.1 J1.3 J1.4 J1.5 J1.7 J1.8 J1.9 J1.11 J1.12 J1.13 J1.15 J1.16 J1.17 J1.18 J1.19 J1.20 J1.21 J1.22 J1.23 J1.24 J1.25 J1.26 J1.27 J1.28 J1.29 J1.30 J1.31 J1.32 J1.33 J1.35 J1.37 J1.39 J1.41 J1.43 J1.45 J1.47 J1.49 J1.51 J1.53 J1.55 J1.57 J1.59 J1.61 J1.63 J1.65 J1.67 J1.69 J1.71 J1.73 J1.75 J1.77 J1.79 J1.81 J1.83 J1.85 J1.87 J1.89 J1.91 J1.93 J1.95 J1.97 J1.99 J2. J2.16 J2.18 J2.20 J2.22 J2.24 J2.26 J2.28 J2.30 J2.32 J2.34 J2.36 J2.38 J2.40 J2.42 J2.44 J2.46 J2.48 J2.50 J2.52 J2.54 J2.56 J2.58 J2.60 J2.62 J2.64 J2.66 J2.68 J2.70 J2.72 J2.74 J2.76 J2.78 J2.80 J2.82 J2.84 J2.86 J2.88 J2.90 J2.92 J2.94 J2.96 J2.98 J3. J3.11 J3.13 J3.15 J3.17 J3.19 J3.21 J3.23 J3.25 J3.27 J3.29 J3.31 J3.33 J3.35 J3.37 J3.39 J3.41 J3.43 J3.45 J3.47 J3.49 J3.51 J3.53 J3.55 J3.57 J3.59 J3.61 J3.63 J3.65 J3.67 J3.69 J3.71 J3.73 J3.75 J3.77 J3.79 J3.81 J3.83 J3.85 J3.87 J3.89 J3.91 J3.93 J3.95 J3.96 J3.97 J3.98 J3.99 J3.100 J6.MH1 J6.MH2

## Polygon pours and split planes (outlines as drawn)
+5V on L1 "+5V_L01_P001" (solid, pour order 1): 1480,230 1535,230 1535,400 1480,400
GND on L1 "GND_L01_P005" (solid, pour order 5): 1480,230 1480,70 1535,70 1535,230
GND on L1 "GND_L01_P004" (solid, pour order 4): 2305,405 2305,230 2400,230 2400,405
GND on L1 "GND_L01_P003" (solid, pour order 3): 2150,400 2150,230 2205,230 2205,400
X1 on L1 "X1_L01_P002" (solid, pour order 2): 2030,400 2030,230 2085,230 2085,400
GND on L4 "GND_L04_P010" (solid, pour order 10): 1480,195 1480,75 1535,75 1535,195
GND on L4 "GND_L04_P009" (solid, pour order 9): 2305,405 2305,230 2400,230 2400,405
GND on L4 "GND_L04_P008" (solid, pour order 8): 2150,400 2150,230 2205,230 2205,400
X1 on L4 "X1_L04_P007" (solid, pour order 7): 2030,400 2030,230 2085,230 2085,400
+5V on L4 "+5V_L04_P006" (solid, pour order 6): 1480,400 1480,230 1535,230 1535,400
+5V on L3 "+5V_L03_P013" (solid, pour order 13): 0.25,3937.26 3937.26,3937.26 3937.26,17.26 3920,0 3919.75,0.25 0.25,0.25
GND on L3 "GND_L03_P011" (solid, pour order 11): 1550,465 1535,450 1535,230 1545,220 2020,220 2030,230 2030,445 2010,465
GND on L2 (split plane): 3917.16,20.35 20.35,20.35 20.35,3917.16 3917.16,3917.16

## Keep-outs
Keep-Out Layer:
  the board outline again, w4

## Silkscreen, mask and mechanical layers (free items; w line width, h text height)
Top Overlay:
  text "DEBUG" at 1256.53,3900.2 h60 r180
  text "PROGRAMMER" at 3245,3895 h60 r180
  text "R" at 2885,3891.09 h472.44 r180
  text "ALARM" at 1590,3775 h60 r180
  text "COMMAND" at 2125,3775 h60 r180
  text "POWER" at 2505,3775 h60 r180
  text "e" at 3121.09,3731.09 h236.22 r180
  text "b" at 3129.33,3618.63 h393.7 r180
  text "W" at 2870,3520 h236.22 r180
  text "UNED" at 2185,3340 h98.43 r180
  text "ionosens" at 2380,3200 h98.43 r180
  text "VIDB" at 2135,785 h98.43 r180
  text "VIDB" at 2189.51,649.23 h78.74 r180
Mechanical 1:
  lines w0.5: 0.25,0.25 0.25,3937.26 3937.26,3937.26 3937.26,0.25 1104.33,0.25

## Text inside footprints (layer, text, board x,y; h text height)
J1: Mechanical 15 "2" at 1499.57,3363.27 h39.37 r180; Mechanical 15 "1" at 1499.57,3658.15 h39.37 r180
J2: Mechanical 15 "2" at 1499.57,107.36 h39.37 r180; Mechanical 15 "1" at 1499.57,402.24 h39.37 r180
J3: Mechanical 15 "1" at 1499.57,73.11 h39.37; Mechanical 15 "2" at 1499.57,367.99 h39.37
J4: Top Overlay "1" at 3671.58,3526.69 h50 r180; Top Overlay "5" at 3268.78,3526.69 h50 r180; Top Overlay "6" at 3268.78,3426.69 h50 r180; Top Overlay "2" at 3671.58,3426.69 h50 r180; Mechanical 13 "1" at 3671.58,3526.69 h50 r180; Mechanical 13 "2" at 3671.58,3426.69 h50 r180; Mechanical 13 "5" at 3268.78,3526.69 h50 r180; Mechanical 13 "6" at 3268.78,3426.69 h50 r180
J5: Top Overlay "6" at 967.72,3478.66 h50; Top Overlay "1" at 264.92,3478.66 h50; Mechanical 13 "6" at 967.72,3478.66 h50; Mechanical 13 "1" at 264.92,3478.66 h50